# Altium PCB ATMEGA328P-AU-SMT2024_N_N.PcbDoc
Units mil, origin at the board's own origin, x right, y up, seen from the top; angles counter-clockwise.
Board outline 3229.53 x 1574.8 mil, 2 copper layers (Top Layer, Bottom Layer); 83 components, 42 nets, 235 pads, 527 vias.
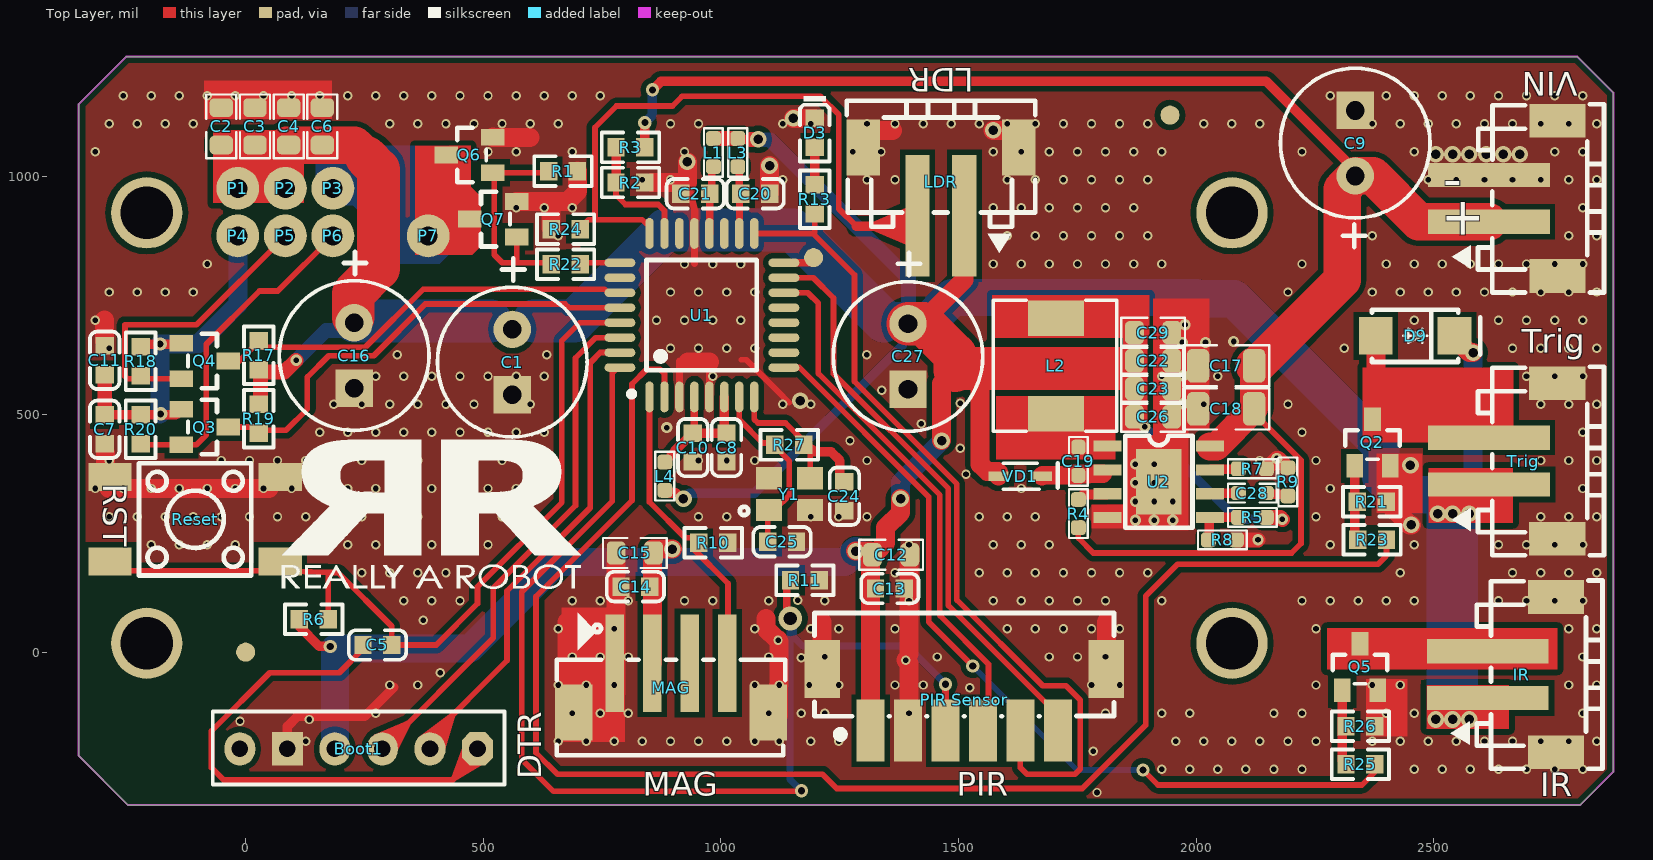
[diagram p0: Top Layer view]
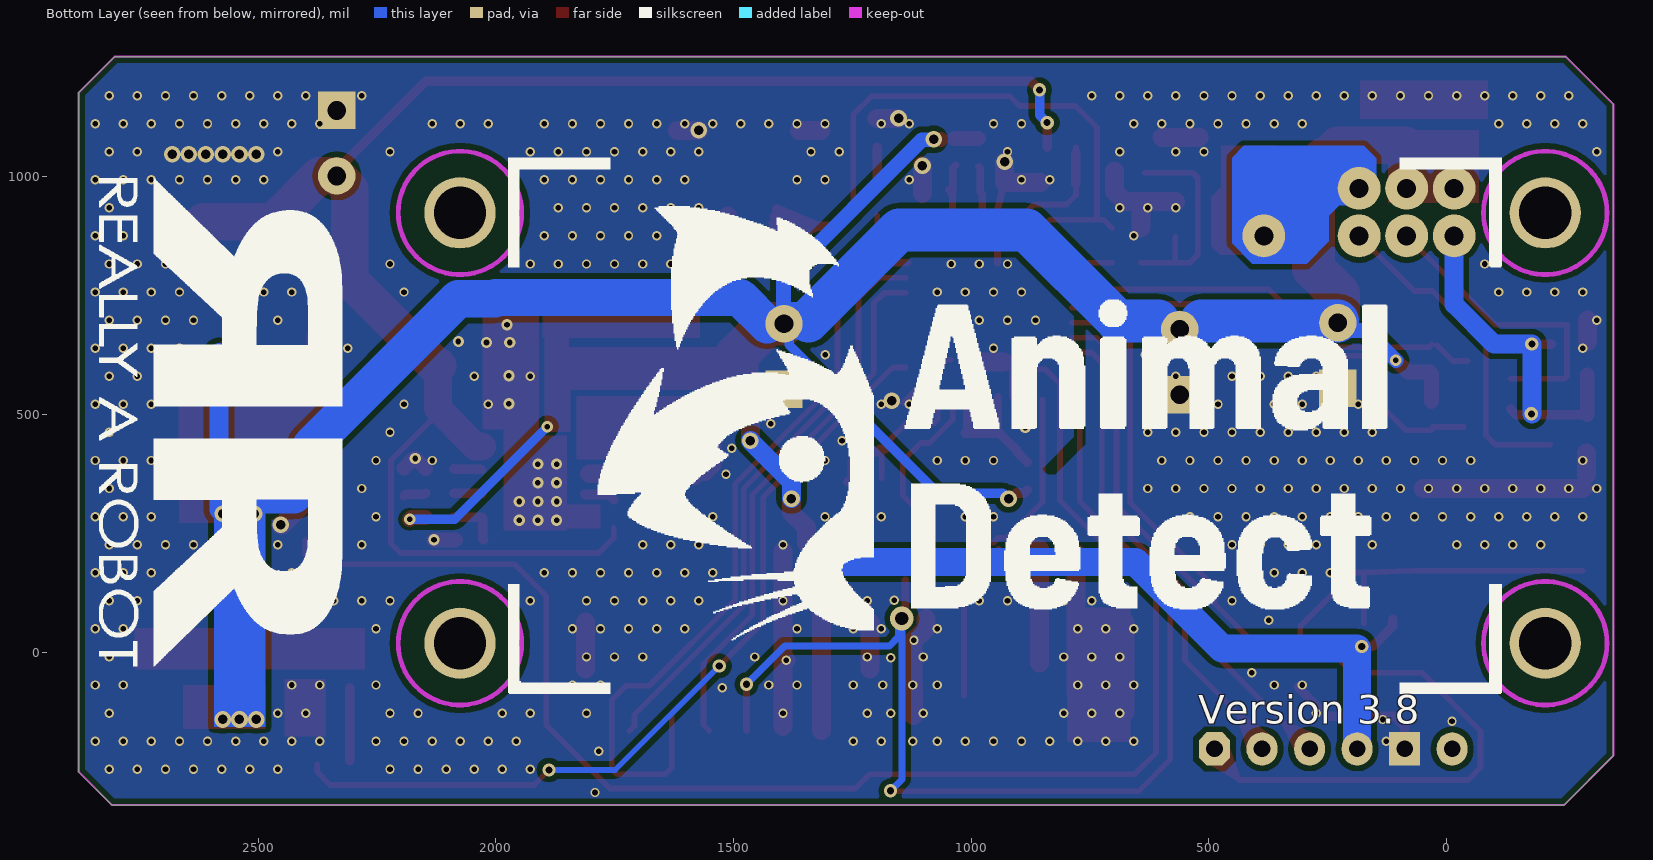
[diagram p1: Bottom Layer view, seen from below]

## Layer stack, top to bottom
Top Solder: solder mask 0.4, Solder Resist, Dk 3.5
Top Layer: signal copper 1.4
Dielectric1: core 12.6, FR-4, Dk 4.8
Bottom Layer: signal copper 1.4
Bottom Solder: solder mask 0.4, Solder Resist, Dk 3.5

## Board outline
-351.57,-217.72 -351.57,1153.14 -251.57,1253.14 2801.98,1253.14 2877.95,1177.17 2877.95,-251.97 2808.26,-321.66 -247.64,-321.66

## Design rules (kind name [scope] priority, off if disabled: settings)
Clearance Clearance_1 [INPOLY] p1: gap=11.81 ignorepadtopadclearanceinfootprint=FALSE
Clearance [All] p2: gap=5.91 ignorepadtopadclearanceinfootprint=FALSE
ComponentClearance [All] p1: gap=0 collisioncheckmode=3 verticalgap=0 showdistances=FALSE
FabricationTestPointUsage TestPointUsage [All] p1: valid=0 allowmultiple=FALSE
FabricationTestpoint Testpoint [(IsPad And (OnTopLayer Or OnBottomLayer))] p1: side=3 testpointundercomponent=TRUE minsize=40 maxsize=100 preferedsize=60 minholesize=0 maxholesize=40 preferedholesize=32 testpointgrid=1 allowsidetop=TRUE allowsidebottom=TRUE usegrid=TRUE gridtolerance=0.01
HoleSize [All] p1: absolutevalues=TRUE maxlimit=393.7 minlimit=1 maxpercent=80.000 minpercent=20.000
MinimumSolderMaskSliver [All] p1: minsoldermaskwidth=5.91
PolygonConnect PolygonConnect_1 [ISPAD] p1: connectstyle=Direct reliefconductorwidth=20 reliefentries=4 polygonreliefangle="90 Angle" airgapwidth=10
PolygonConnect [ISVIA] p2: connectstyle=Direct reliefconductorwidth=40 reliefentries=4 polygonreliefangle="90 Angle" airgapwidth=10
RoutingVias [All] p1: holewidth=28 width=50 viastyle="Through Hole" minholewidth=11.81 minwidth=15.75 maxholewidth=28 maxwidth=50
SilkToSilkClearance [All] p1: silktosilkclearance=0
SilkToSolderMaskClearance [IsPad] p1: minsilkscreentomaskgap=0 clearancetoexposedcopper=TRUE
SolderMaskExpansion [All] p1: expansion=4 istentingtop=FALSE
Width [All] p1: maxlimit=200 minlimit=10 preferedwidth=10
23 further rules are at their usual default settings.

## Components (designator, comment, footprint, x,y, rotation, side; value= is the part's Value field where it differs from the comment)
Boot1 "2.54_6ЕЕДё" FP-SWR25X-NRTC-S06-ST-BA-MFG 237.8,-191.74 r180 top
C1 "NJCON 1026R30812R00" "Cap 8mm" 561.02,610.24 r270 top
C2 "6.3V 47uF X5R" C0805(2013) -51.18,1106.3 r270 top
C3 "6.3V 47uF X5R" C0805(2013) 19.68,1106.3 r270 top
C4 "6.3V 47uF X5R" C0805(2013) 90.55,1106.3 r270 top
C5 "100nF" 0603C 247,15 r0 top
C6 "6.3V 47uF X5R" C0805(2013) 161.42,1106.3 r270 top
C7 "100nF" 0603C -296.52,438.64 r90 top
C8 "100nF" 0603C 1011.81,400 r90 top
C9 "NJCON 1026R30812R00" "Cap 8mm" 2334.65,1070.87 r90 top
C10 "10uF" 0603C 940.94,400 r90 top
C11 "10uF" 0603C -296.52,644.29 r270 top
C12 "6.3V 47uF X5R" C0805(2013) 1358.27,204.72 r180 top
C13 "100nF" 0603C 1385.83,133.86 r180 top
C14 "100nF" 0603C 789.76,137.8 r0 top
C15 "6.3V 47uF X5R" C0805(2013) 818.9,208.66 r0 top
C16 "NJCON 1026R30812R00" "Cap 8mm" 228.35,624.02 r270 top
C17 "22uF 25V, 10%, X7R" C1206(3216) 2062.99,602.36 r0 top
C18 "22uF 25V, 10%, X7R" C1206(3216) 2062.99,511.81 r0 top
C19 "100nF 50V  X7R" C0603(1608) 1751.97,401.57 r270 top
C20 "100nF" 0603C 1102.36,964.57 r180 top
C21 "10uF" 0603C 915.75,964.57 r0 top
C22 "22uF 25V, 10%, X5R" C0805(2013) 1909.46,613.2 r180 top
C23 "22uF 25V, 10%, X5R" C0805(2013) 1909.46,554.14 r180 top
C24 "20pF" 0603C 1259.84,297.64 r90 top
C25 "20pF" 0603C 1159.06,232.28 r180 top
C26 "22uF 25V, 10%, X5R" C0805(2013) 1909.46,495.09 r180 top
C27 "NJCON 1026R30812R00" "Cap 8mm" 1393.7,622.05 r270 top
C28 "2.7nF 16V 10% X7R" C0603(1608) 2118.11,334.65 r180 top
C29 "22uF 25V, 10%, X5R" C0805(2013) 1909.46,672.25 r180 top
D3 "ємµЖ" 0603LED 1197.62,1123 r270 top
D9 "1N4007" SMA 2460.63,665.35 r180 top
IR "XH-2PS" CNS_2.5-2 2685.04,-47.24 r90 top
L1 "L-0603" R0603 984.25,1051.18 r90 top value="280mA 10uH"
L2 "MWSA0603S-6R8MT" "L (7.00mm x 6.60mm)" 1704.72,602.36 r90 top value=6.8uH
L3 "L-0603" R0603 1035.43,1051.18 r90 top value="280mA 10uH"
L4 "L-0603" R0603 881.89,370.08 r90 top value="280mA 10uH"
LDR "XH-2PS" CNS_2.5-2 1463,990 r180 top
MAG "HC-HY-4ALT" CNS_4P-P2.0 895,-75 r0 top
P1 "0914-0-15-20-77-14-11-0" 0914-0-15-20-77-14-11-0 -16.35,975.81 r180 top
P2 "0914-0-15-20-77-14-11-0" 0914-0-15-20-77-14-11-0 83.65,975.81 r270 top
P3 "0914-0-15-20-77-14-11-0" 0914-0-15-20-77-14-11-0 183.65,975.81 r90 top
P4 "0914-0-15-20-77-14-11-0" 0914-0-15-20-77-14-11-0 -16.35,875.81 r0 top
P5 "0914-0-15-20-77-14-11-0" 0914-0-15-20-77-14-11-0 83.65,875.81 r0 top
P6 "0914-0-15-20-77-14-11-0" 0914-0-15-20-77-14-11-0 183.65,875.81 r0 top
P7 "0914-0-15-20-77-14-11-0" 0914-0-15-20-77-14-11-0 384.01,875.81 r0 top
"PIR Sensor" "WAFER-PH2.0-6PLB" CNS-2.0-6 1512,-100 r180 top
Q2 "AO3400" SOT-23 2370.87,441.17 r270 top
Q3 "2N7002" SOT-23 -85.87,473.64 r180 top
Q4 "2N7002" SOT-23 -85.87,612.64 r180 top
Q5 "AO3400" SOT-23 2344.76,-31.28 r270 top
Q6 "AO3400" SOT-23 471,1046 r0 top
Q7 "AO3400" SOT-23 521,911 r0 top
R1 "10K" 0603R 698,1012 r180 top
R2 "7K5" 0603R 779.37,988 r0 top
R3 "30K" 0603R 840,1062 r180 top
R4 "10k 5%" R0603 1751.97,291.34 r90 top
R5 "62k 1%" R0603 2118.11,283.46 r180 top
R6 "10K" 0603R 113,69 r0 top
R7 "137k 5%" R0603 2118.11,385.83 r0 top
R8 "11k 1%" R0603 2055.12,236.22 r0 top
R9 "24k 5%" R0603 2192.91,358.27 r90 top
R10 "10K" 0603R 1014.04,229.96 r180 top (schematic designator R21)
R11 "10K" 0603R 1206.95,151.22 r180 top (schematic designator R21)
R13 "7K5" 0603R 1197.62,983 r270 top
R17 "10K" 0603R 27.56,655.12 r270 top
R18 "10K" 0603R -220.87,581.64 r90 top
R19 "10K" 0603R 27.56,460.63 r90 top
R20 "10K" 0603R -220.87,438.64 r90 top
R21 "10K" 0603R 2399.87,316.57 r180 top
R22 "220R" 0603R 643,816.24 r0 top
R23 "220R" 0603R 2339.87,236.57 r0 top
R24 "30K" 0603R 643,890 r0 top
R25 "220R" 0603R 2315.13,-235.87 r0 top
R26 "10K" 0603R 2375.76,-155.87 r180 top
R27 "1M" 0603R 1174,436 r180 top value=1K
Reset "6X6X6°ґјь" SW-4P-6X6 -106.3,279.53 r0 top
Trig "XH-2PS" CNS_2.5-2 2687.87,402.04 r90 top
U1 "ATMEGA328P-AU" TQFP-32_L7.0-W7.0-P0.80-LS9.0-BL 960,709 r0 top
U2 "RT7272BGSP" "SOIC8 +" 1813.15,434.45 r0 top
VD1 "1N4148WS-7-F" SOD-323 1629.92,370.08 r180 top
VIN "XH-2PS" CNS_2.5-2 2687.99,954.72 r90 top
Y1 "16.000MHz 20pF" X3225 1099,301 r90 top

## Footprints (in the part's own frame and the unit in brackets; to place one, negate y for a bottom-side part, rotate by r counter-clockwise, add the part's x,y. Pads: shape width x height; smd on the part's side, far side on the other; paste and mask are expansions set on the pad)
0603C [mm]
  rect 0.93x0.98 smd: 1(0,0) 2(1.54,0)
  silkscreen extent -0.76,-0.79 2.31,0.79
0603LED [mm]
  rect 0.93x0.98 smd: 1(1.54,0) 2(0,0)
  silkscreen extent -1.21,-0.79 2.3,0.79
0603R [mm]
  rect 0.93x0.98 smd: 1(0,0) 2(1.54,0)
  silkscreen extent -0.76,-0.79 2.31,0.79
0914-0-15-20-77-14-11-0 [mil]
  round 90 hole 40: 1(0,0)
  body extent -39,-39 39,39, height 197
C0603(1608) [mm]
  rrect50% 0.8x0.75 smd: 1(-0.75,0) 2(0.75,0)
  silkscreen extent -1.3,-0.5 1.3,0.5, body extent -0.8,-0.4 0.8,0.4, height 0.3
C0805(2013) [mm]
  rrect50% 1x1.25 smd: 1(-1,0) 2(1,0)
  silkscreen extent -1.7,-0.8 1.7,0.8, body extent -1,-0.62 1,0.63, height 0.73
C1206(3216) [mm]
  rrect50% 1.2x1.8 smd: 1(-1.5,0) 2(1.5,0)
  silkscreen extent -2.3,-1.1 2.3,1.1, body extent -1.6,-0.8 1.6,0.8, height 1
"Cap 8mm" [mm]
  round 2 hole 1: 1(-1.75,0)
  rect 2x2 hole 1: 2(1.75,0)
  silkscreen extent -5.55,-4 4,4
CNS-2.0-6 [mm]
  rect 1.5x3.3 smd: 1(5,1.65) 2(3,1.65) 3(1,1.65) 4(-1,1.65) 5(-3,1.65) 6(-5,1.65)
  rect 1.9x3.1 smd: 7(7.6,-1.65) 8(-7.6,-1.65)
  silkscreen extent -8,-4.63 8,2.05
CNS_2.5-2 [mm]
  rect 1.3x6.5 smd: 1(-1.25,1.825) 2(1.25,1.825)
  rect 1.8x3 smd: 3(4.15,-1.825) 4(-4.15,-1.825)
  silkscreen extent -5.03,-4.32 5.03,3.81
CNS_4P-P2.0 [mm]
  rect 1x5.2 smd: 1(-3,1.314) 2(-1,1.314) 3(1,1.314) 4(3,1.314)
  rect 2x3 smd: 5(5.2,-1.314) 6(-5.2,-1.314)
  silkscreen extent -6.1,-3.6 6.1,4
FP-SWR25X-NRTC-S06-ST-BA-MFG [mil]
  oct 65x70 hole 35 paste-39370.1 mask+0: 1(-250,11.81)
  oval 65x70 hole 35 paste-39370.1 mask+0: 2(-150,11.81) 3(-50,11.81) 4(50,11.81) 6(250,11.81)
  rect 65x70 hole 35 paste-39370.1 mask+0: 5(150,11.81)
  silkscreen extent -307,-67 307,87, body extent -311,-124 311,124, height 10
"L (7.00mm x 6.60mm)" [mm]
  rect 1.9x3 smd: 1(-2.55,0) 2(2.55,0)
  silkscreen extent -3.5,-3.25 3.5,3.35, body extent -3.5,-3.25 3.5,3.35, height 2.8
R0603 [mm]
  rrect50% 0.8x0.8 smd: 1(-0.75,0) 2(0.75,0)
  silkscreen extent -1.3,-0.5 1.3,0.5, body extent -0.8,-0.4 0.8,0.4, height 0.45
SMA [mm]
  rect 1.8x2 smd: 1(2.1,0) 2(-2.1,0)
  silkscreen extent -3.47,-1.4 2.3,1.4
SOD-323 [mm]
  rect 1.075x0.5 smd: 1(-1.162,0) 2(1.162,0)
  silkscreen extent -2,-0.7 0.9,0.7, body extent -1.27,-0.64 1.23,0.61, height 0.8
"SOIC8 +" [mm]
  rect 1.5x0.6 smd: 1(0,-0.025) 2(0,-1.295) 3(0,-2.565) 4(0,-3.835) 5(5.492,-3.835) 6(5.492,-2.565) 7(5.492,-1.295) 8(5.492,-0.025)
  rect 2.41x3.5 smd paste-0.011: 9(2.746,-1.935)
  silkscreen extent 0.95,-4.39 4.55,0.53, body extent -0.25,-4.39 5.74,0.52, height 1.7
SOT-23 [mm]
  rect 1.25x0.9 smd: 1(1.25,-0.95) 2(1.25,0.95) 3(-1.25,0)
  silkscreen extent -0.65,-1.46 0.9,1.46
SW-4P-6X6 [mm]
  rect 2.3x1.5 smd: 1(-4.55,2.25) 2(4.55,2.25) 3(-4.55,-2.25) 4(4.55,-2.25)
  silkscreen extent -3,-3 3,3
TQFP-32_L7.0-W7.0-P0.80-LS9.0-BL [mm]
  oval 0.45x1.65 smd: 1(-2.8,-4.369) 2(-2,-4.369) 3(-1.2,-4.369) 4(-0.4,-4.369) 5(0.4,-4.369) 6(1.2,-4.369) 7(2,-4.369) 8(2.8,-4.369) 17(2.8,4.369) 18(2,4.369) 19(1.2,4.369) 20(0.4,4.369) 21(-0.4,4.369) 22(-1.2,4.369) 23(-2,4.369) 24(-2.8,4.369)
  oval 1.65x0.45 smd: 9(4.381,-2.8) 10(4.381,-2) 11(4.381,-1.2) 12(4.381,-0.4) 13(4.381,0.4) 14(4.381,1.2) 15(4.381,2) 16(4.381,2.8) 25(-4.381,2.8) 26(-4.381,2) 27(-4.381,1.2) 28(-4.381,0.4) 29(-4.381,-0.4) 30(-4.381,-1.2) 31(-4.381,-2) 32(-4.381,-2.8)
  silkscreen extent -3.91,-4.36 2.94,2.95
X3225 [mm]
  rect 1.2x1.4 smd: 1(-0.05,-0.05) 2(-0.05,-2.25) 3(1.65,-2.25) 4(1.65,-0.05)
  silkscreen extent -0.33,1.05 0.13,1.5

## Part data
Boot1: library part f2cb566baf1c37ab5a3b8e90bbeafd6, "CONN HEADER VERT 6POS 2.54MM", Current Rating=3A, Manufacturer=Sullins, Package=SWR25X-NRTC-S06-ST-BA, Temperature="-25ЎгC to +85ЎгC", Temperature Range High=+85ЎгC, Category=Conn, ComponentLink2Description=Datasheet, ComponentLink2URL=https://drawings-pdf.s3.amazonaws.com/11633.pdf, Conn Orientation=Straight, Device Class L1=Connectors, Digikey Description="CONN HEADER VERT 6POS 2.54MM", Lead Free=Yes, Number Of Rows=1, Octopart=https://octopart.com/swr25x-nrtc-s06-st-ba-sullins-20912730, Pitch=2.54mm, RoHS=TRUE
C1 C9 C16 C27: library part "CAP 8mm"
C2 C3 C4 C6 C12 C15 C22 C23 C26 C29: library part C-0805, "SMD-0805", Type=CAP
C5 C7 C8 C10 C11 C13 C14 C20 C21: library part CAP-NP-2, "Capacitor, Ceramic, 22 pF, +/-10 %, 100 V, -55 to 125 degC, 2-Pin THD, RoHS, Bulk", Max Input Voltage="40 V", Max Operating Temperature="125 degC", Min Input Voltage="4.2 V", Min Operating Temperature="0 degC", Output Current="1.5 A", Package Quantity=50, ComponentLink1Description="Manufacturer URL", ComponentLink1URL=http://www.kemet.com/, ComponentLink2Description=Datasheet, ComponentLink2URL=http://capacitoredge.kemet.com/capedge2/DataSheet/Datasheet-C315C220K1G5TA.pdf?pn=C315C220K1G5TA{BULK}, Height="9.28 mm", Length="10.28 mm", Pins=3, Radiation Hardening=No, REACH SVHC="No SVHC", RoHSCompliant=true
C17 C18: library part C-1206, "SMD-1206", Type=CAP
C19 C28: library part C-0603, "SMD-0603", Type=CAP
C24 C25: library part C
D3: library part 8706943c75ba83719d021d2fdc84c58, "LED YELLOW DIFFUSED T-1 T/H", Colour=Yellow, Forward Voltage=1.8V, Manufacturer=Broadcom, Package=0, Temperature="-40ЎгC to +100ЎгC", Temperature Range High=+100ЎгC, Automotive=No, Category=Diode, Device Class L1=Optoelectronics, Digikey Description="LED YELLOW DIFFUSED T-1 T/H", Lead Free=Yes, Led Orientation=Straight, Luminous Intensity=2.1mcd, Mouser Description="Standard LEDs - Through Hole Yellow Diffused 585nm 2.1mcd", Viewing Angle=50Ўг, Wavelength=585nm
D9: library part Diode, "Default Diode", Code_JEDEC=DO-214-AB, LatestRevisionDate=17-Jul-2002, LatestRevisionNote="Re-released for DXP Platform.", PackageDescription="DO-214-AB/SMC; 2 C-Bend Leads; Body 7.9 x 5.9 mm, inc. leads (LxW)", PackageReference=SMC, PackageVersion=Sep-1996, Published=8-Jun-2000, Publisher="Altium Limited"
IR LDR Trig VIN: library part "JST HXP2"
L1 L3 L4: "FTW1608FE100KT"
L2: "6.8uH 5A 48m? SMD (7.00mm x 6.60mm)", ComponentLink1Description=INDUCTOR, ComponentLink1URL=https://www.lcsc.com/product-detail/Power-Inductors_APV-APH0530T6R8M_C5349684.html, Type="SMD Bead"
MAG: library part "MAG Sensor"
P1 P2 P3 P4 P5 P6 P7: "CONTACT SPRING LOADED T/H GOLD"
"PIR Sensor": library part "JST - PH-6p - 2.0mm"
Q2 Q3 Q4 Q5 Q6 Q7: library part IRF640N
R1 R2 R3 R6 R10 R11 R13 R17 R18 R19 R20 R21 R22 R23 R24 R25 R26: library part RES-2, "Little Demon(R) Carbon Composition Molded OD Series, 250 V, 10 KOhm, +/-5%, -70 to 130 degC, 2-Pin THD, RoHS, Bulk", Package Description="2-Pin THD Resistor, Body 7 x 2.5 mm, Lead Dia. 0.6 mm", Power (Watts)=0.25W,1/4W, Power Rating=0.25W, Resistance (Ohms)=10k, Temperature Coefficient=-, Tolerance=ЎА5%, Category=Resistors, Composition=CarbonComposition, Datasheet Version=06/2016, Height=-, Manufacturer URL=http://www.ohmite.com/, Mounting Technology=ThroughHole, Number of Terminations=2, Online Catalog=OD,OF,OASeries,LittleDemon?, RoHS Information="LittleDemon\"E\"SeriesMaterialDeclaration", Size / Dimension="0.098\"Diax0.276\"L(2.50mmx7.00mm)"
R4 R5 R7 R8 R9: library part R-0603, "SMD 0603 0.1W 5% 50V", Type=RES
R27: library part Res1, "Resistor", Published=8-Jun-2000, Publisher="Altium Limited", Revision="July-2002: Re-released for DXP Platform."
Reset: library part SW-SPST-4_A, "Tactile Switch, SPST-NO, 0.05 A, 5 to 24 V, -25 to 70 degC, 4-Pin THD, RoHS, Bulk", Min Operating Temperature="-40 degC", ComponentLink1URL=http://www.omron.com/, ComponentLink2Description=Datasheet, ComponentLink2URL=http://www.omron.com/ecb/products/pdf/en-b3f.pdf, Contact Material=Brass, Contact Plating=Gold, Gender=Female, Height="14.99 mm", Lead Pitch="1.27 mm", PackageReference=B3F-1000, Packaging=Tray, Pins=8, Radiation Hardening=No, RoHSCompliant=true, Shielding=Shielded, Width="25.4 mm"
U1: JLCPCB Part Class="Extended Part", Operating Voltage Range=1.8V~5.5V, 8Bit Timer=-, 16Bit Timer=-, 32Bit Timer=-, ADC (Bit)=10bit, Add into BOM=yes, Application Area=-, CAN=-, CCP Capture/Compare=-, communication protocol=-, Convert to PCB=yes, CPU Core=AVR, CPU Maximum Speed=20MHz, DAC (Bit)=-, Datasheet=https://atta.szlcsc.com/upload/public/pdf/source/20140621/1457707095197.pdf, Device=ATMEGA328P-AU, Direct Memory Access=-, EEPROM=1KB, GPIO Ports Number=23, I2C=-, I2S=-, Infrared Data Association=-, Internal Comparator=-, LCD Module=-, LED Module=-, Manufacturer Part=ATMEGA328P-AU, Program Memory Type=FLASH, Program Storage Size=32KB, PWM (Bit)=-, RAM Size=2KB, Real-Time Clock=-, Secure Digital Input and Output=-, SPI=-, Supplier=LCSC, Supplier Footprint=TQFP-32(7x7), Supplier Part=C14877, Symbol=ATMEGA328P-AU, UART/USART=-, Universal Serial Bus=-
U2: "Buck Switching Regulator IC Positive Adjustable 0.8V 1 Output 3A 8-SOIC (0.154, 3.90mm Width) Exposed Pad", Package="SOP-8 Richtek", Availability="In Stock", Check_prices=https://www.snapeda.com/parts/RT7272BGSP/Richtek+USA+Inc./view-part/?ref=eda, MF="Richtek USA", MP=RT7272BGSP, Price=None, Purchase-URL=https://pricing.snapeda.com/search?q=RT7272BGSP&ref=eda, SnapEDA_Link=https://www.snapeda.com/parts/RT7272BGSP/Richtek+USA+Inc./view-part/?ref=snap
VD1: "Diode Switching 150mA 75V 200mW SOD323 Diodes Inc 1N4148WS-7-F Switching Diode, 150mA 75V, 2-Pin SOD-323", Type=Diode
Y1: library part R25010031, "R25010031/¹¤ÒµC/Ïû·ÑA/¾§ÌåÕñµ´Æ÷/8.000M/20pF/¡À30ppm/49USM/ROHS/-10¡æ~+70¡æ", ОпБП±аВл=R25010031, ОпБПГиКц=ѕ§МеХсµґЖч/8.000M/20pF/ЎА30ppm/49USM/ROHS/-10Ўж~+70Ўж, УЕСЎµИј¶=№¤ТµC/Пы·СA, Ч°ЕдАаРН=SMD

## Free pads (board coordinates)
  round 40 smd: 0(1195,830) 0(1944.88,1129.92) 1(0,0)
  round 150 hole 110.24: 1(-208.08,18.69) 2(-208.08,924.2) 3(2075.38,924.2) 4(2075.38,18.69)

## Via types
v1: diameter 19.68, hole 11.81, Top Layer to Bottom Layer, tented both sides, 469 vias
v2: diameter 35, hole 20, Top Layer to Bottom Layer, 26 vias
v3: diameter 23.62, hole 11.81, Top Layer to Bottom Layer, 22 vias
v4: diameter 28, hole 15, Top Layer to Bottom Layer, 9 vias
v5: diameter 50, hole 28, Top Layer to Bottom Layer, 1 vias

## Nets (pads, with @x,y where several pads share a name; then routed paths per layer and width w, separated by ;. In a path a pad name is that pad's centre, name@x,y a point inside that pad or via, vN(x,y) a via of type N, cw(c..) or ccw(c..) an arc to the next point about the centre after c; other vN are vias at no path point)
5V1: "PIR Sensor.1" Boot1.4 C1.1 C2.2 C3.2 C4.2 C6.2 C12.2 C13.2 C14.2 C15.2 C16.1 C22.2 C23.2 C26.2 C27.1 C29.2 D9.2 IR.1 L1.2 L2.2 L3.2 L4.1 LDR.1 MAG.2 P1.1 P2.1 R5.1 R6.1 R17.2 R19.2 Trig.1 VD1.2 | length 8828
  Top Layer w20: R6.1 113,54 155,12 v4(178,12) ; L4.1 887.64,334.8 905.23,334.8 917.2,322.83 v2(921.26,322.83)
  Top Layer w31.5: R19.2@31.5,527.56 31.5,586.61 34.06,589.17 81.49,589.17 v3(106.3,613.98) ; L1.2 L3.2 ; v2@1062.99,1078.74 v2(1078.74,1078.74) ; R5.1 2177.17,283.46 v3(2181.1,279.53)
  Top Layer w39.37: C27.1@1419.29,690.94 1511.81,783.46 LDR.1@1511.81,917.75 ; 1545.28,592.52 1545.28,394.91 1560.27,379.92 1582.7,379.92 1584.17,378.45 VD1.2
  Top Layer w40: MAG.2 855.63,216.54 v2(897.64,216.54) ; v2(1283.46,212.6) 1315.15,212.6 1315.15,-164.96 ; C12.2@1328.74,212.6 1346.14,230 1346.14,261.81 1377.95,293.62 v2(1377.95,322.83) ; v2(1464.57,444.88) 1464.57,564.96 1492.13,592.52 ; D9.2 2543.31,661.42 2574.8,629.92 v2(2582.68,629.92)
  Top Layer w78.74: C4.2@86.61,1066.93 87.45,1066.09 229.01,1066.09 253.85,1041.25
  Top Layer w90: C16.1@226.38,704.72 226.38,753.94 279.56,807.12 279.56,1015.54 253.85,1041.25
  Top Layer w90.55: C27.1@1419.29,690.94 C27.1 1427.17,690.94 1492.13,625.98 1492.13,592.52
  Bottom Layer w19.68: v3(1891.73,474.41) 2086.61,279.53 v3(2181.1,279.53)
  Bottom Layer w20: v2(921.26,322.83) 933.07,334.65 1070.87,334.65 1382.46,646.24 1382.46,694.31 C27.1@1379.92,696.85
  Bottom Layer w31.5: v3(106.3,613.98) 169.48,677.17 C16.1@208.66,677.17 ; v2(1078.74,1078.74) 1079.41,1078.07 1103.29,1078.07 1394.43,786.92 1394.43,691.68 C27.1
  Bottom Layer w40: v2(1377.95,322.83) 1377.95,358.27 v2(1464.57,444.88) ; v2(2574.8,291.34) 2582.68,299.21 v2(2582.68,629.92)
  Bottom Layer w59.06: Boot1.4 187.8,8 472,8 654,190 1260.87,190 v2(1283.46,212.6)
  Bottom Layer w78.74: 1342.52,696.85 C27.1@1379.92,696.85 ; C27.1@1429.13,688.98 1486.22,746.06 2000.02,746.06 2002.16,743.93 2078.91,743.93 2388.09,434.74 2388.09,367.57 2424.86,330.8 2499.91,330.8 v2(2539.37,291.34)
  Bottom Layer w90: C16.1@228.35,696.85 515.75,696.85 ; 606.3,696.85 692.06,696.85 883.62,888.41 1150.96,888.41 1342.52,696.85
  other v2: 2503.94,-141.73 2539.37,-141.73 2574.8,-141.73 2507.87,291.34
A0-BATT: R2.1 R3.2 U1.23 | length 266.6
  Top Layer w12: R2.1 779.37,961.63 799,942 868,942 881.26,928.74 U1.23 ; R3.2@779.37,1050.37 R3.2
  Top Layer w20: R2.1@779.37,985 R3.2@779.37,1050.37
A1-LDR: LDR.2 R24.2 U1.24 | length 1851.1
  Top Layer w12: R24.2@703.63,892 721.63,910 735,910 ; U1.24 849.76,894.24 834,910 735,910 ; 1285,896 1248.03,932.97 1248.03,1130.97 1209.71,1169.29 918.29,1169.29 898,1149 780,1149 735,1104 735,910
  Top Layer w20: 1285,896 LDR.2@1413.79,896 ; 1343.17,888.8 LDR.2@1421.09,883.2 ; LDR.2@1408.88,859.05 1322.33,896 ; LDR.2@1408.88,932.95 1322.33,896 ; LDR.2 1322.33,896 ; LDR.2@1416.2,889.25 1322.33,896 ; LDR.2@1416.2,902.75 1322.33,896
A2-GATE: R22.2 U1.25 | length 83.9
  Top Layer w12: R22.2@703.63,819.24 U1.25
A4-SDA: Q4.3 R17.1 U1.27 | length 890.3
  Top Layer w12: Q4.3@-44.87,612.64 Q4.3 -13.35,612.64 R17.1@19.68,645.67 ; R17.1@31.5,647.24 37.1,641.64 251.87,641.64 374.02,763.78 754.8,763.78 762.33,756.24 U1.27
A5-SCL: Q3.3 R19.1 U1.28 | length 973.2
  Top Layer w12: Q3.3 R19.1@28.35,473.64 ; R19.1@31.5,466.93 85.04,466.93 129.92,511.81 129.92,578.74 174.91,623.73 269.4,623.73 377.95,732.28 672.21,732.28 679.75,724.75 U1.28
BAT+: C9.1 C17.2 C18.2 R3.1 R4.1 U2.8 VIN.1 | length 3558.9
  Top Layer w11.81: R4.1 1751.97,240.16 1783.46,208.66 2200.79,208.66 2220.47,228.35 2220.47,403.82 2122.05,502.25 C18.2
  Top Layer w20: R3.1 v4(840,1114) ; v4(856,1183) 873.79,1200.79 2147.64,1200.79 C9.1@2338.58,1009.84
  Top Layer w59.06: U2.8@2029.37,433.07 2042.24,433.07 2122.05,512.88 C17.2
  Top Layer w78.74: C17.2 2125.98,602.36 2307.09,783.46 2307.09,974.41 C9.1 2372.05,1001.97 2468.51,905.51 VIN.1
  Bottom Layer w20: v4(840,1114) 856,1130 v4(856,1183)
CRYSTAL1: C25.2 R27.2 U1.7 Y1.1 | length 371.6
  Top Layer w11.81: U1.7 1038.74,488.82 1087.56,440 1106,440 1144,402 1144,330 Y1.1@1114,300 ; C25.2 1098.43,296.49 Y1.1
CRYSTAL2: C24.2 R27.1 U1.8 Y1.3 | length 378.7
  Top Layer w11.81: U1.8 1070.24,489.76 1078,482 1136,482 R27.1@1178.58,439.42 ; Y1.3 R27.1@1187.58,426.71
  Top Layer w20: R27.1@1178.58,439.42 1178.58,430.43 1182.31,426.71 1187.58,426.71 1191.29,426.71 1196.74,421.26 1232.28,421.26 1250.55,402.99 1250.55,366.57 1258.86,358.27 C24.2
CS: "PIR Sensor.4" U1.14 | length 1129.1
  Top Layer w12: U1.14@1137.16,756.24 1182.76,756.24 1205,734 1205,586.34 1460.63,330.71 1460.63,77.01 1562.99,-25.36 1562.99,-153.34 1551.37,-164.96
D2-PIR: "PIR Sensor.3" R11.2 U1.32 | length 2486.3
  Top Layer w12: U1.32@782.83,598.76 771.65,587.58 771.65,317.65 581,127 581,-226 648,-293 1168.19,-293 v4(1169.57,-291.62)
  Top Layer w15: R11.2@1138.39,151.22 1138.39,87.61 1145.67,80.34 v5(1145.67,70.87) ; 1472.63,-164.96 v4(1472.63,-67.63)
  Bottom Layer w15: v4@1173.23,-295.28 v4(1169.57,-291.62) 1145.67,-267.72 v5(1145.67,70.87) 1152.37,64.17 1152.37,32.67 1171.92,13.12 1391.88,13.12 v4(1472.63,-67.63)
D3-MAG: MAG.4 R10.2 U1.1 | length 695.1
  Top Layer w12: U1.1@849.76,531.83 849.76,315.59 924.87,240.48 942.89,240.48 R10.2 ; R10.2@941.86,217.43 1015.11,144.18 MAG.4@1015.11,-92
D4-TRIG: R23.2 U1.2 | length 3214.7
  Top Layer w12: U1.2@881.26,531.83 U1.2 881.26,585.74 872,595 844,595 813,564 813,319 611,117 611,-212 656,-257 1213.69,-257 1243.69,-287 1760.24,-287 1893.7,-153.54 1893.7,118.11 1960.63,185.04 2382.41,185.04 2397.64,200.27 2397.64,200.79 2400.5,203.65 R23.2
D5-IR: R25.2 U1.9 | length 1784.1
  Top Layer w12: U1.9@1137.16,598.76 1165.02,598.76 1437.01,326.77 1437.01,63.99 v4(1530,-29) ; v4(1888,-248) 1919.53,-279.53 2348.63,-279.53 2375.76,-252.4 R25.2
  Bottom Layer w12: v4(1530,-29) 1749,-248 v4(1888,-248)
D13-LED: "PIR Sensor.5" R13.2 U1.17 | length 1798.7
  Top Layer w12: U1.17 1193.8,881 1281,793.8 1281,569.39 1496.44,353.95 1496.44,109.86 1677.17,-70.87 1726.08,-70.87 1755.91,-100.69 1755.91,-246.09 1745,-257 1644,-257 1630.11,-243.11 1630.11,-164.96 1630.11,-129 ; 1197.62,883 R13.2@1197.62,919.37
DTR: Boot1.1 C5.1 | length 1482.1
  Top Layer w12: C5.1 247,6.84 196.85,-43.31 50.69,-43.31 -72,-166 -72,-243 -46,-269 436,-269 493,-212 Boot1.1@493,-201 ; Boot1.1@464.77,-192.94 437.65,-267.35 ; Boot1.1@475.78,-197.94 437.65,-267.35 ; Boot1.1@487.8,-206.05 437.65,-267.35 ; Boot1.1@498.13,-216.22 437.65,-267.35 ; Boot1.1@505.21,-226.03 437.65,-267.35
GND: "PIR Sensor.2" "PIR Sensor.7" "PIR Sensor.8" Boot1.5 C1.2 C2.1 C3.1 C4.1 C6.1 C7.1 C8.1 C9.2 C10.1 C11.1 C12.1 C13.1 C14.1 C15.1 C16.2 C17.1 C18.1 C20.1 C21.1 C22.1 C23.1 C24.1 C25.1 C26.1 C27.2 C29.1 D3.2 IR.3 IR.4 LDR.3 LDR.4 MAG.1 MAG.5 MAG.6 Q2.2 Q5.2 Q6.2 Q7.2 R1.1 R2.2 R7.2 R8.2 R9.2 R10.1 R11.1 R21.1 R24.1 R26.1 Reset.1 Reset.2 Trig.3 Trig.4 U1.3 U1.5 U1.21 U2.4 U2.9 VIN.2 VIN.3 VIN.4 Y1.2 Y1.4 | length 3414.4
  Top Layer w12: 1043,615 1053.34,615 1123.8,544.54 1139.34,529 1143.34,525
  Top Layer w15: U1.3 912.76,612.24 ; 930,988 934.71,969.36 944.88,929.13 U1.21 944.25,818 ; U1.5 975.75,610 975.75,612.75 ; R21.1@2408.27,325.17 Q2.2
  Top Layer w20: Boot1.5 87.8,-156.2 109,-135 251,-135 312,-74
  Top Layer w31.5: R8.2 v3(2129.92,236.22) ; R7.2 v3(2169.29,407.48) 2173.23,407.48 R9.2
  Top Layer w40: C11.1@-297.21,653.29 -297.21,698.29 ; Reset.1@-295.28,374.02 -295.28,419.02 ; Reset.1@-287.13,344.66 -257.69,344.66 -198.63,344.66 -120.51,344.66 -80.52,344.66 -21.46,344.66 Reset.2@49.66,344.66 ; Q6.2 520.94,1082.68 559.06,1082.68 598.43,1082.68 ; Q7.2 628.4,948.4 ; R24.1@643,892 643,933.8 628.4,948.4 ; MAG.6@676.53,-126.73 676.53,-11 676.53,63.47 ; R1.1 698,969 677.4,948.4 628.4,948.4 ; MAG.1@778.89,-86 778.89,-23.28 778.89,149.9 C15.1@778.89,207 ; R2.2@854.33,988 930,988 v2@930,1031.5 ; 931,610 975.75,610 976,610 ; 1094.76,70.51 1094.76,49.78 1118.21,26.34 v1@1120.25,26.34 ; C20.1 v2(1102.36,1023.62) ; v1(1120.25,24.72) 1122.42,22.54 v1(1122.42,-69.19) ; MAG.5@1121,-133 MAG.5@1121,-69.19 ; v2(1152.62,1123) D3.2 ; 1212.79,-35.04 1212.79,63.47 ; LDR.3@1316,1097 1361,1097 ; v1(1389.06,-16.93) 1396,-23.88 1396,-156 ; 1396,-4 1396,48 1396,149.9 C12.1@1396,212.6 ; v2(1573,1098) LDR.4@1618,1098 ; 1811.21,-35.04 1811.21,63.47 ; R21.1@2401.87,314.57 2448.72,267.72 v2(2452.76,267.72) ; Q2.2@2405.87,393.57 2408.27,393.57 v2(2450.87,393.57)
  other v1: 1791.34,-295.28 1927.35,-246.35 1986.41,-246.35 2045.46,-246.35 2104.52,-246.35 2163.57,-246.35 2222.63,-246.35 2458.85,-246.35 2517.9,-246.35 2576.96,-246.35 2636.01,-246.35 2695.07,-246.35 2754.12,-246.35 2813.18,-246.35 1783.46,-208.66 126.17,-187.3 657.67,-187.3 716.72,-187.3 775.78,-187.3 834.83,-187.3 893.89,-187.3 952.94,-187.3 1012,-187.3 1071.05,-187.3 1122.42,-187.3 1189.16,-187.3 1248.22,-187.3 1956.88,-187.3 2015.94,-187.3 2074.99,-187.3 2134.05,-187.3 2193.1,-187.3 2252.16,-187.3 2370.27,-187.3 2429.32,-187.3 2488.38,-187.3 2547.43,-187.3 2606.49,-187.3 2665.54,-187.3 2724.6,-187.3 2783.65,-187.3 2842.71,-187.3 -11.81,-145.67 133.86,-141.73 273.81,-128.24 687.2,-128.24 746.25,-128.24 805.31,-128.24 1100.58,-128.24 1168.92,-128.24 1218.69,-128.24 1395.86,-128.24 1809.24,-128.24 1927.35,-128.24 1986.41,-128.24 2163.57,-128.24 2222.63,-128.24 2399.79,-128.24 2458.85,-128.24 2813.18,-128.24 1523.62,-74.8 303.34,-69.19 362.39,-69.19 657.67,-69.19 716.72,-69.19 775.78,-69.19 1071.05,-69.19 1185.81,-69.19 1248.22,-69.19 1366.33,-69.19 1425.39,-69.19 1779.72,-69.19 1838.77,-69.19 2252.16,-69.19 2370.27,-69.19 2429.32,-69.19 2783.65,-69.19 2842.71,-69.19 409.45,-43.31 1168.92,-12.08 687.2,-10.13 746.25,-10.13 805.31,-10.13 1100.58,-10.13 1218.69,-10.13 1454.91,-10.13 1691.13,-10.13 1750.19,-10.13 1809.24,-10.13 2813.18,-10.13 657.67,48.92 716.72,48.92 775.78,48.92 1071.05,48.92 1189.16,48.92 1248.22,48.92 1366.33,48.92 1602.55,48.92 1661.61,48.92 1720.66,48.92 1779.72,48.92 1838.77,48.92 2252.16,48.92 2783.65,48.92 2842.71,48.92 374.02,66.93 1100.36,107.75 332.87,107.98 391.92,107.98 450.98,107.98 687.2,107.98 746.25,107.98 805.31,107.98 923.42,107.98 982.47,107.98 1218.69,107.98 1395.86,107.98 1573.02,107.98 1632.08,107.98 1691.13,107.98 1750.19,107.98 1809.24,107.98 1927.35,107.98 2222.63,107.98 2281.68,107.98 2340.74,107.98 2399.79,107.98 2458.85,107.98 2636.01,107.98 2695.07,107.98 2754.12,107.98 2813.18,107.98 1161.64,109 244.28,167.03 303.34,167.03 362.39,167.03 421.45,167.03 1366.33,167.03 1543.5,167.03 1602.55,167.03 1661.61,167.03 1720.66,167.03 1779.72,167.03 1838.77,167.03 1897.83,167.03 2429.32,167.03 2665.54,167.03 2724.6,167.03 2783.65,167.03 2842.71,167.03 -198.63,226.09 -139.57,226.09 -80.52,226.09 -21.46,226.09 155.7,226.09 214.76,226.09 273.81,226.09 332.87,226.09 391.92,226.09 450.98,226.09 510.03,226.09 1395.86,226.09 1573.02,226.09 1632.08,226.09 1691.13,226.09 2281.68,226.09 2458.85,226.09 2636.01,226.09 2695.07,226.09 2754.12,226.09 2813.18,226.09 -287.21,285.14 -228.16,285.14 -169.1,285.14 -110.05,285.14 -50.99,285.14 8.06,285.14 67.12,285.14 126.17,285.14 185.23,285.14 244.28,285.14 303.34,285.14 362.39,285.14 421.45,285.14 480.5,285.14 539.56,285.14 952.94,285.14 1012,285.14 1189.16,285.14 1248.22,285.14 1307.27,285.14 1543.5,285.14 1602.55,285.14 1661.61,285.14 2252.16,285.14 2724.6,285.14 2783.65,285.14 2842.71,285.14 -316.74,344.2 -257.69,344.2 -198.63,344.2 -139.57,344.2 -80.52,344.2 -21.46,344.2 37.59,344.2 96.65,344.2 155.7,344.2 214.76,344.2 273.81,344.2 332.87,344.2 391.92,344.2 450.98,344.2 510.03,344.2 569.09,344.2 628.14,344.2 1632.08,344.2 2281.68,344.2 2813.18,344.2 1515.75,374.02 -287.21,403.25 -50.99,403.25 8.06,403.25 67.12,403.25 126.17,403.25 185.23,403.25 244.28,403.25 303.34,403.25 362.39,403.25 421.45,403.25 480.5,403.25 539.56,403.25 598.61,403.25 952.94,403.25 1012,403.25 1071.05,403.25 1307.27,403.25 2134.05,403.25 2252.16,403.25 2724.6,403.25 2783.65,403.25 2842.71,403.25 1503.94,429.13 1271.65,444.88 155.7,462.31 214.76,462.31 273.81,462.31 332.87,462.31 391.92,462.31 450.98,462.31 510.03,462.31 569.09,462.31 628.14,462.31 2222.63,462.31 2813.18,462.31 1421.26,480.31 185.23,521.36 244.28,521.36 303.34,521.36 362.39,521.36 421.45,521.36 480.5,521.36 598.61,521.36 1130.11,521.36 1189.16,521.36 2015.94,521.36 2193.1,521.36 2724.6,521.36 2783.65,521.36 2842.71,521.36 1503.94,523.62 1338.58,551.18 273.81,580.42 332.87,580.42 391.92,580.42 450.98,580.42 510.03,580.42 569.09,580.42 628.14,580.42 982.47,580.42 1927.35,580.42 2045.46,580.42 2695.07,580.42 2754.12,580.42 2813.18,580.42 318.9,625.98 633.86,625.98 1307.09,625.98 -287.21,639.47 893.89,639.47 952.94,639.47 1012,639.47 1071.05,639.47 2311.21,639.47 2665.54,639.47 2724.6,639.47 2783.65,639.47 2842.71,639.47 -316.74,698.53 864.36,698.53 923.42,698.53 982.47,698.53 1041.53,698.53 2458.85,698.53 2636.01,698.53 2695.07,698.53 2754.12,698.53 2813.18,698.53 -287.21,757.58 -228.16,757.58 -169.1,757.58 -110.05,757.58 893.89,757.58 952.94,757.58 1012,757.58 1071.05,757.58 2193.1,757.58 2370.27,757.58 2429.32,757.58 2488.38,757.58 2547.43,757.58 2606.49,757.58 2665.54,757.58 2724.6,757.58 2783.65,757.58 2842.71,757.58 -80.52,816.64 923.42,816.64 982.47,816.64 1041.53,816.64 1573.02,816.64 1632.08,816.64 1691.13,816.64 1750.19,816.64 1809.24,816.64 1868.3,816.64 1927.35,816.64 2222.63,816.64 2399.79,816.64 2458.85,816.64 2517.9,816.64 2576.96,816.64 2636.01,816.64 2695.07,816.64 2754.12,816.64 2813.18,816.64 657.67,875.69 1602.55,875.69 1661.61,875.69 1720.66,875.69 1779.72,875.69 1838.77,875.69 1897.83,875.69 2370.27,875.69 2783.65,875.69 2842.71,875.69 569.09,934.75 628.14,934.75 687.2,934.75 1573.02,934.75 1632.08,934.75 1691.13,934.75 1750.19,934.75 1809.24,934.75 1868.3,934.75 2813.18,934.75 834.83,993.8 893.89,993.8 1130.11,993.8 1307.27,993.8 1366.33,993.8 1602.55,993.8 1661.61,993.8 1720.66,993.8 1779.72,993.8 1838.77,993.8 1897.83,993.8 2488.38,993.8 2547.43,993.8 2606.49,993.8 2665.54,993.8 2724.6,993.8 2783.65,993.8 2842.71,993.8 -316.74,1052.86 510.03,1052.86 569.09,1052.86 687.2,1052.86 923.42,1052.86 1277.75,1052.86 1336.8,1052.86 1573.02,1052.86 1632.08,1052.86 1691.13,1052.86 1750.19,1052.86 1809.24,1052.86 1868.3,1052.86 1927.35,1052.86 2222.63,1052.86 2458.85,1052.86 2754.12,1052.86 2813.18,1052.86 -287.21,1111.91 -228.16,1111.91 -169.1,1111.91 -110.05,1111.91 303.34,1111.91 362.39,1111.91 421.45,1111.91 480.5,1111.91 539.56,1111.91 598.61,1111.91 657.67,1111.91 893.89,1111.91 952.94,1111.91 1130.11,1111.91 1189.16,1111.91 1307.27,1111.91 1366.33,1111.91 1425.39,1111.91 1484.44,1111.91 1543.5,1111.91 1602.55,1111.91 1661.61,1111.91 1720.66,1111.91 1779.72,1111.91 1838.77,1111.91 1897.83,1111.91 2015.94,1111.91 2074.99,1111.91 2134.05,1111.91 2370.27,1111.91 2429.32,1111.91 2488.38,1111.91 2547.43,1111.91 2606.49,1111.91 2665.54,1111.91 2724.6,1111.91 2783.65,1111.91 2842.71,1111.91 -257.69,1170.97 -198.63,1170.97 -139.57,1170.97 -80.52,1170.97 -21.46,1170.97 37.59,1170.97 96.65,1170.97 155.7,1170.97 214.76,1170.97 273.81,1170.97 332.87,1170.97 391.92,1170.97 450.98,1170.97 510.03,1170.97 569.09,1170.97 628.14,1170.97 687.2,1170.97 746.25,1170.97 2281.68,1170.97 2399.79,1170.97 2458.85,1170.97 2517.9,1170.97 2576.96,1170.97 2636.01,1170.97 2695.07,1170.97 2754.12,1170.97 2813.18,1170.97
  other v2: 1167,529 929.13,1031.5 2503.94,1047.24 2539.37,1047.24 2574.8,1047.24 2610.24,1047.24 2645.67,1047.24 2681.1,1047.24
  other v3: 1872.05,277.56 1911.42,277.56 1950.79,277.56 1872.05,316.93 1911.42,316.93 1950.79,316.93 1872.05,356.3 1911.42,356.3 1872.05,395.67 1911.42,395.67 885.83,472.44 1972.44,522.65 1972.44,581.7 1970.47,651.57 2019.68,651.57 2078.74,653.54 1976.38,688.98
MISO: pad.0@1195,830 U1.16 | length 69.1
  Top Layer w15: U1.16 1189.24,819.24 pad.0@1198,828
MOSI: "PIR Sensor.6" U1.15 | length 1228.5
  Top Layer w12: U1.15@1137.16,787.74 1194.26,787.74 1237,745 1237,585.83 1478.54,344.3 1478.54,97.94 1708,-131.53 1708,-155.76 1718.69,-166.46
NetC8_2: C8.2 C10.2 L4.2 U1.4 U1.6 | length 311
  Top Layer w15.75: C10.2 943.88,463.56 943.88,536.62 U1.4
  Top Layer w20: L4.2 903.37,421.09 903.37,424.04 939.96,460.63 C10.2 C8.2@1007.24,460.63 ; U1.6 C8.2@1007.24,460.63 ; C8.2 C8.2@1007.24,460.63
NetC19_1: C19.1 L2.1 U2.1
NetC19_2: C19.2 U2.2 VD1.1 | length 170.6
  Top Layer w39.37: VD1.1 1675.67,370.57 1677.15,372.05 C19.2 ; 1773.5,374.02 1742.13,374.02 1743.7,375.59 U2.2@1803.31,375.59
NetC20_2: C20.2 L3.1 U1.18 | length 163
  Top Layer w15.75: L3.1@1032.48,1024.61 L3.1 1038.58,1018.5 1038.58,967.72 1040.55,965.75 C20.2 C20.2@1039.12,961.95 ; U1.18 1039.12,881.38 C20.2@1039.12,961.95 ; C20.2@1038.78,961.61 C20.2@1039.12,961.95 ; C20.2@1047.24,972.44 1039.12,964.31 C20.2@1039.12,961.95
NetC21_2: C21.2 L1.1 U1.20 | length 144.2
  Top Layer w15.75: U1.20 976.12,881.38 976.12,921.4 976.38,921.65 C21.2 980.32,968.5 980.32,1017.72 L1.1
NetC28_1: C28.1 R9.1 | length 47.7
  Top Layer w20: C28.1 2150.59,331.69 2189.96,331.69 R9.1
NetC28_2: C28.2 U2.6 | length 59.7
  Top Layer w20: U2.6 2029.96,334.06 2087.99,334.06 C28.2
NetD3_1: D3.1 R13.1 | length 79.4
  Top Layer w20: R13.1 D3.1
NetD9_1: D9.1 Q2.3 Trig.2 | length 126.3
  Top Layer w40: D9.1 2377.95,566.93 2397.64,547.24
NetIR_2: IR.2 Q5.3
NetQ2_1: Q2.1 R21.2 R23.1 | length 161
  Top Layer w20: R23.1@2333.46,236.98 Q2.1@2333.46,397.95
NetQ5_1: Q5.1 R25.1 R26.2 | length 153.6
  Top Layer w20: R25.1@2307.35,-228.09 Q5.1@2307.35,-74.49
NetQ6_1: Q6.1 Q7.1 R1.2 R22.1 | length 458.7
  Top Layer w12: 570.21,819.24 Q7.1 ; R1.2@633.97,1008.6 533.6,1008.6 523,998 523,836 539.76,819.24 R22.1@643,819.24
NetR4_2: R4.2 U2.3 | length 66.4
  Top Layer w20: R4.2 1762.76,331.65 1811.34,331.65 U2.3
NetR5_2: R5.2 R8.1 U2.5 | length 108.1
  Top Layer w20: R8.1 2027.48,238.11 2027.48,281.65 2029.29,283.46 U2.5 R5.2
NetR7_1: R7.1 U2.7 | length 60.2
  Top Layer w20: U2.7 2030.55,384.65 2087.4,384.65 R7.1
POGO-3V: C7.2 C11.2 P4.1 Q3.1 Q4.1 R18.2 R20.2 | length 813.9
  Top Layer w20: C7.2@-286.5,499.27 R20.2 -146.85,499.27 Q3.1 ; R18.2@-220.87,648.27 v4(-179.87,648.27) Q4.1@-136.85,648.27
  Top Layer w30: C7.2 C11.2
  Bottom Layer w40: v4@-179.87,501.27 v4(-179.87,648.27) -99.76,648.27 -16.35,731.69 P4.1
  other v4: -178.87,501.27
POGO-GND: P3.1 P7.1 Q6.3 Q7.3
POGO-SCL: P6.1 Q3.2 R20.1 | length 696.1
  Top Layer w12: R20.1@-218.46,436.24 Q3.2 -103.27,436.24 -82.72,456.78 -82.72,647.78 29.34,759.84 67.68,759.84 P6.1
POGO-SDA: P5.1 Q4.2 R18.1 | length 643.9
  Top Layer w12: Q4.2 -248.46,575.24 -253.72,580.5 -253.72,688.64 -103.52,688.64 P5.1
RESET: C5.2 R6.2 Reset.3 Reset.4 U1.29 | length 1766.3
  Top Layer w12: Reset.3@-287.13,171.43 71.13,171.43 173.63,167.49 194.51,167.49 307.63,54.37 C5.2 401,15 488,102 488,137.61 665.35,314.96 665.35,655.35 703.25,693.25 U1.29 ; R6.2@173.63,60 R6.2 173.63,164.12
RX: Boot1.3 U1.30 | length 1476.6
  Top Layer w12: Boot1.3@273.18,-178.94 342,-149.35 ; Boot1.3@278.85,-189.64 342,-149.35 ; Boot1.3 521,29.65 521,135.17 694,308.17 694,619 736.76,661.76 U1.30 ; Boot1.3@287.8,-201.05 342,-149.35 ; Boot1.3@298.77,-210.53 342,-149.35 ; Boot1.3@309.19,-216.69 342,-149.35
TX: Boot1.2 U1.31 | length 1447.7
  Top Layer w12: Boot1.2@368.69,-182.68 436.33,-131.47 ; Boot1.2@376.65,-191.77 436.33,-131.47 ; Boot1.2 387.8,-180 550,-17.8 550,128.74 725,303.74 725,609 746.26,630.26 U1.31 ; Boot1.2@387.8,-201.05 436.33,-131.47 ; Boot1.2@400.35,-208.3 436.33,-131.47 ; Boot1.2@411.63,-212.63 436.33,-131.47
pads on no net: Boot1.6 MAG.3 U1.10 U1.11 U1.12 U1.13 U1.19 U1.22 U1.26

## Polygon pours and split planes (outlines as drawn)
GND on Top Layer "PWR-No Net" (solid, remove dead copper, pour order 1004): 2877.95,1250.06 -236.57,1250.06 -336.57,1150.06 -336.57,-220.81 -273.49,-283.9 -232.64,-324.75 -152,-324.75 2877.96,-324.75
GND on Top Layer "PWR-No Net" (solid, remove dead copper, pour order 1000): 818,883 1092,883 1132,843 1132,587 1108,563 814,563 813,564 765,612 765,685 765,849 794,878 802,886 827,886
GND on Bottom Layer "PWR-No Net" (solid, remove dead copper, pour order 1001): 2877.95,1250.06 -236.57,1250.06 -336.57,1150.06 -336.57,-220.81 -273.49,-283.9 -232.64,-324.75 -152,-324.75 2877.96,-324.75

## Keep-outs
Bottom Layer:
  circle w10: c2075.38,18.69 r130
  circle w10: c2075.38,924.2 r130
  circle w10: c-208.08,924.2 r130
  circle w10: c-208.08,18.69 r130
Keep-Out Layer:
  lines w3.94: -351.57,-217.72 -247.64,-321.66 2807.09,-321.66 2808.26,-321.66 2877.95,-251.97 2877.95,1177.17 2801.98,1253.14 -251.57,1253.14 -351.57,1153.14 -351.57,-217.72

## Other copper
Top Layer:
  rectangle net 5V1: 1846.46,614.17 1897.64,681.1
  rectangle net 5V1: 2484.25,-161.42 2658.49,-69.12
  rectangle net 5V1: 1484.25,551.18 1870.09,641.73
  rectangle net 5V1: 1842.52,463.59 1897.65,629.92
  rectangle net NetC19_1: 1578.74,405.51 1830.71,539.37
  rectangle net GND: 1940.94,653.54 2027.56,744.09
  rectangle net GND: 1909.45,417.32 1984.25,484.25
  rectangle net GND: 1850.39,255.91 1984.25,455.31
  rectangle net GND: 1779.53,259.84 1944.88,311.02
  rectangle net GND: 1909.45,468.5 2027.56,744.09
  rectangle net 5V1: 1570.87,661.42 1901.57,750.9
  rectangle net GND: 665,-189 798,94
  rectangle net NetIR_2: 2275.59,-36.87 2759.84,51.18
  rectangle net NetD9_1: 2350.39,440.57 2667.87,598.43
  rectangle net 5V1: -68.98,944.88 122.89,1098.43
  rectangle net 5V1: 2488.37,271.65 2666.37,387.57
  rectangle net GND: 2379.87,292.57 2475.87,417.57
  rectangle net GND: 2357.76,-177.87 2444.88,-56.87
  pour cut-out: 703.63,893.87 703.63,871.17 703.63,819.24 837.46,819.24 843.36,825.14 827,841.5 827,893.87
  pour cut-out: 1457.82,618.11 1457.82,556.7 1455.9,554.78 1459.5,551.18 1509,551.18 1509,607.16 1514.36,612.52
  region net POGO-GND: 495,958 474,979 474,1065 357,1065 357,836 477,836 495,854
  region net GND: 181.1,1202.54 -86.61,1202.54 -86.61,1122.05 181.1,1122.05
Bottom Layer:
  rectangle net 5V1: 2484.25,-157.48 2592.87,311.02
  pour cut-out: 782.84,452.76 849.77,385.83 850.39,385.83 838.58,374.02 822.83,374.02 759.84,437.01 759.84,452.76
  pour cut-out: 759.84,732.26 759.84,452.76 782.84,452.76 782.84,743.82
  region net POGO-GND: 148,1039 174,1065 426,1065 451,1040 451,860 408,817 294,817 247,864 247,918 225,940 168,940 148,960

## Silkscreen, mask and mechanical layers (free items; w line width, h text height)
Top Overlay:
  drawing of 14 lines, arcs and shapes, not listed
  text "LDR" at 1531.5,1228.35 h50 r180
  text "-" at 2519.68,956.69 h80
  text "+" at 2515.75,877.95 h80
  text "Trig" at 2685.04,629.92 h50
  text "RST" at -299.21,354.33 h50 r270
  text "MAG" at 836,-302 h50
  text "PIR" at 1495.76,-302.61 h50
  text "IR" at 2724.41,-303.15 h50
Bottom Overlay:
  drawing of 34 lines, arcs and shapes, not listed
  text "Version 3.8" at 521.89,-150.24 h60

## Text inside footprints (layer, text, board x,y; h text height)
Boot1: Top Overlay "DTR" at 622.05,-267.72 h50 r90